# Altium PCB PCB1.PcbDoc
Units mil, origin at the board's own origin, x right, y up, seen from the top; angles counter-clockwise.
Board outline 2490.03 x 1245.03 mil, 2 copper layers (Top Layer, Bottom Layer), stack 34.331 mil thick; 22 components, 18 nets, 80 pads, 4 vias.
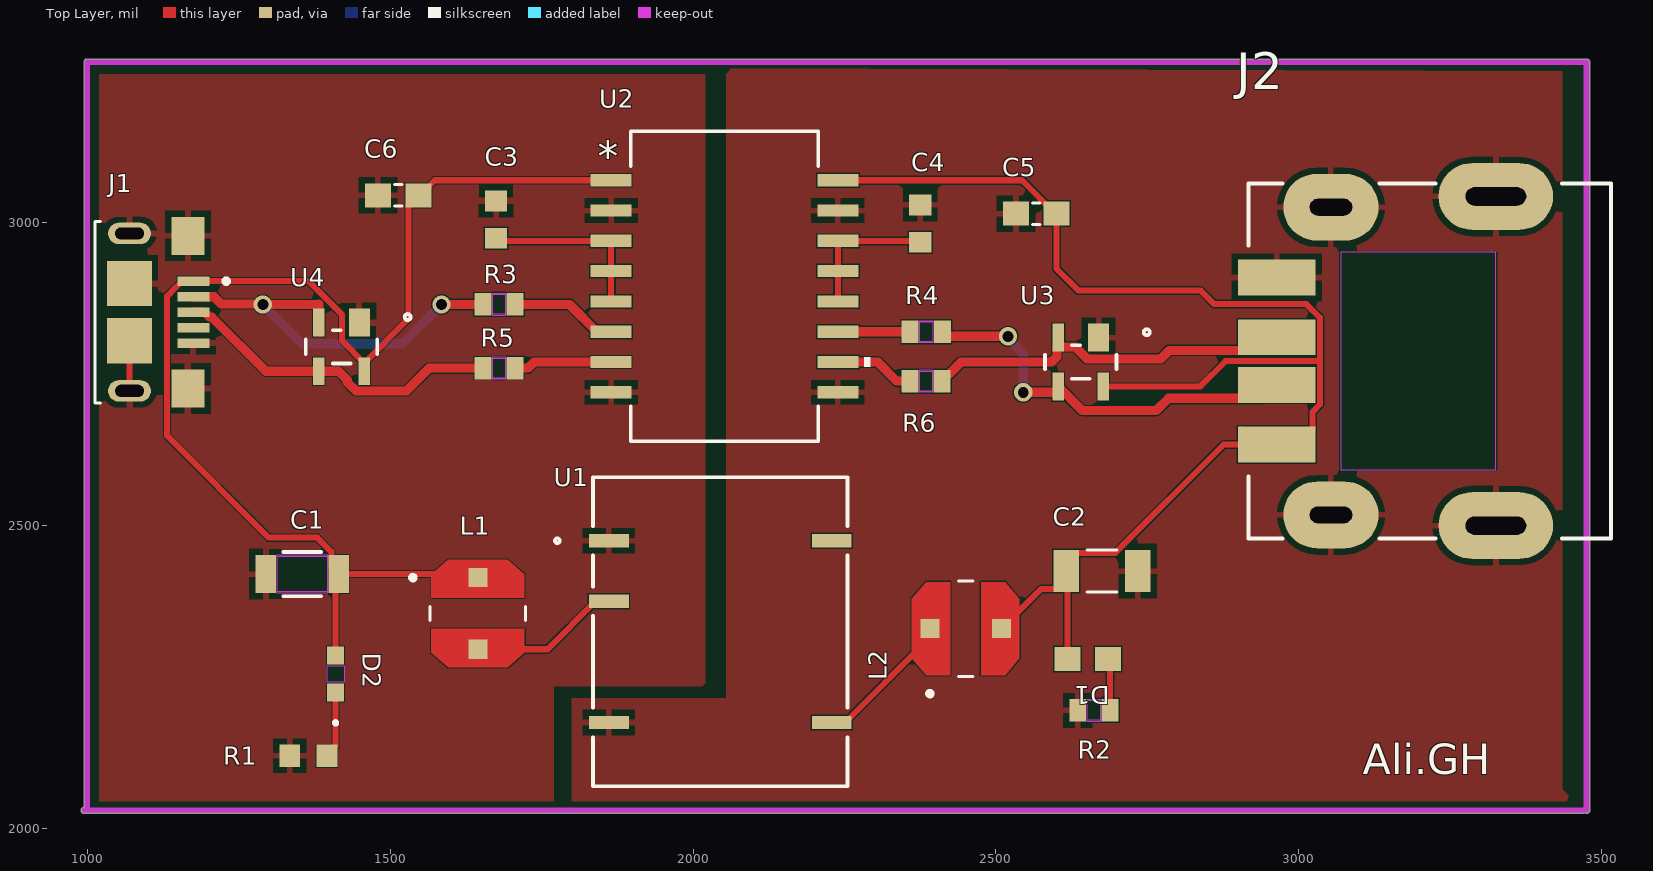
[diagram p0: Top Layer view]
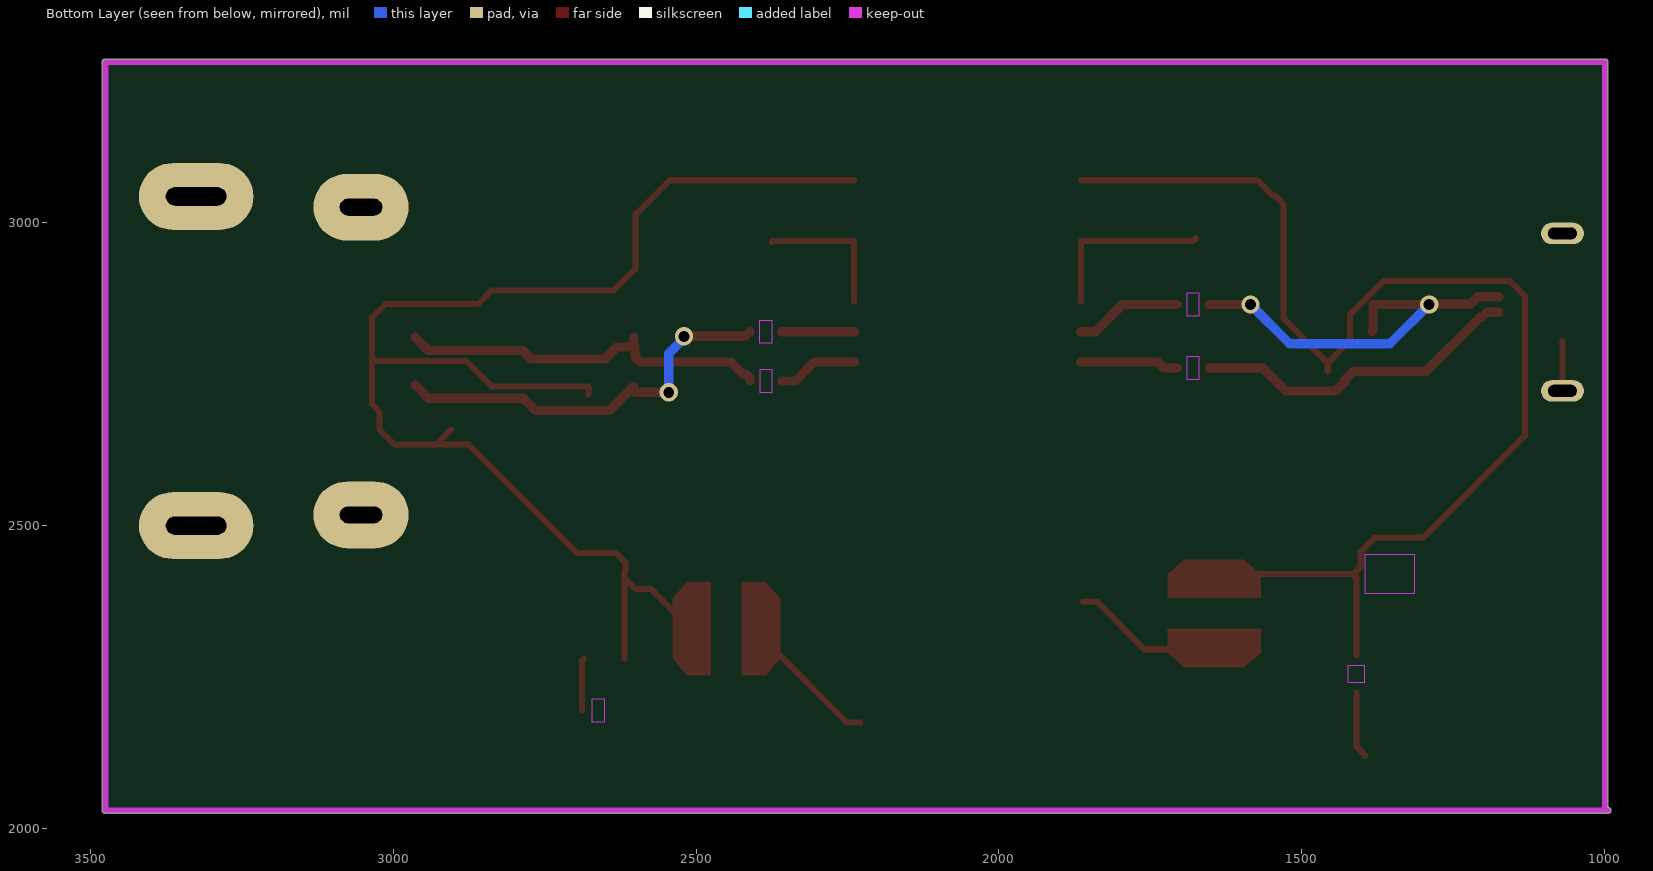
[diagram p1: Bottom Layer view, seen from below]
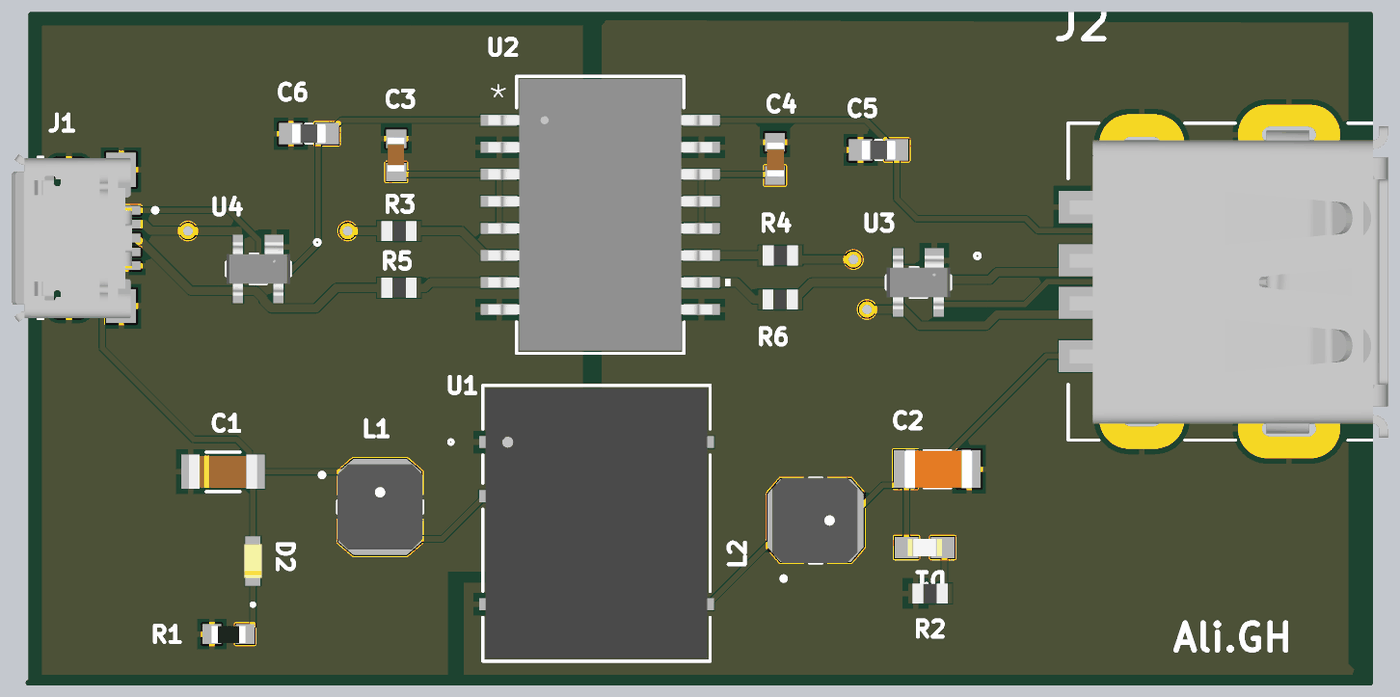
[diagram p2: 3D render of the assembled board from above, using the file's embedded part models]

## Layer stack, top to bottom
Top Solder: solder mask 0.3937, Solder Resist, Dk 3.5
Top Layer: signal copper 1.4173
Dielectric 1: dielectric 31.4961, FR-4, Dk 4.8
Bottom Layer: signal copper 1.4173
Bottom Solder: solder mask 0.3937, Solder Resist, Dk 3.5

## Board outline
995,2024.98 cw(c995,2030) 994.98,2035.02 994.99,3265 cw(c1000,3265) 1000,3270.01 3475,3270.01 cw(c3475,3265) 3480.01,3265 3480.01,2030 cw(c3475,2030) 3472.5,2025.65 3470,2024.98

## Design rules (kind name [scope] priority, off if disabled: settings)
AssemblyTestPointUsage [All] p1: valid=2
Clearance [All] p1: gap=2 ignorepadtopadclearanceinfootprint=TRUE except(1: Arc-Hole Track-Hole SMDPad-Hole THPad-Hole Via-Hole Fill-Hole Poly-Hole Region-Hole Text-Hole)
DiffPairsRouting [All] p1: maxlimit=5 minlimit=5 mostfreqgap=5 toplayer_minwidth=15.2 toplayer_maxwidth=15.2 toplayer_prefwidth=15.2 bottomlayer_minwidth=15.2 bottomlayer_maxwidth=15.2 bottomlayer_prefwidth=15.2 maxuncoupledlength=700
FabricationTestPointUsage [All] p1: valid=2 allowmultiple=FALSE
MinimumSolderMaskSliver [All] p1: minsoldermaskwidth=1
PolygonConnect [All] p1: connectstyle=Relief reliefconductorwidth=10 reliefentries=4 polygonreliefangle="90 Angle" airgapwidth=10
RoutingVias [All] p1: holewidth=28 width=50 viastyle="Through Hole" minholewidth=10 minwidth=25 maxholewidth=28 maxwidth=50
SilkToSolderMaskClearance [IsPad] p1: minsilkscreentomaskgap=3 clearancetoexposedcopper=TRUE
SolderMaskExpansion [All] p1: expansion=4 istentingtop=FALSE
Width [All] p1: maxlimit=10 minlimit=10 preferedwidth=10
25 further rules are at their usual default settings.

## Classes and differential pairs
differential pair DOUTT: +DOUTT_P -DOUTT_N
differential pair DOUT: +DOUT_P -DOUT_N
differential pair DINT: +DINT_P -DINT_N
differential pair DIN: +DIN_P -DIN_N

## Components (designator, comment, footprint, x,y, rotation, side; value= is the part's Value field where it differs from the comment)
C1 "4.7uF" CAP_CL31_SAM 1354.85,2420 r0 top
C2 "10uF" CAPC3216X140N 2675,2425 r180 top
C3 "0.1uF" CAPC1608X90N 1675,3005 r270 top
C4 "0.1uF" CAPC1608X90N 2375,2998.5 r90 top
C5 "1uF" CAPC1608X90 2566.54,3015 r0 top
C6 "1uF" CAPC1608X90 1513.46,3045 r180 top
D1 "Blue" 0603 2651.54,2280 r180 top
D2 "Green" LED_LTST-C191KGKT_LTO 1410,2255 r90 top
J1 "10118193-0001LF" AMPHENOL_10118193-0001LF 1070,2852.24 r270 top
J2 "1932638-3" CONN4_1932638-3_TEC 2963.58,2633.86 r90 top
L1 "15uH" IND_VLCF4028T-150MR88-2 1645,2355 r0 top
L2 "22uH" IND_VLCF4024T-220MR65-2 2450,2330 r90 top
R1 "680 Ohms" RESC1608X55N 1365,2120 r0 top
R2 "390Ohms" RES_CRCW_0603#1 2661.5,2195 r0 top
R3 "24Ohms" RES_CRCW_0603#2 1680,2865 r180 top
R4 "24Ohms" RES_CRCW_0603#1 2385,2820 r180 top
R5 "24Ohms" RES_CRCW_0603#1 1680,2760 r180 top
R6 "24Ohms" RES_CRCW_0603#1 2384.5,2738.5 r180 top
U1 "NXE2S0505MC-R7" NXE2_SINGLE_SURFACE_MUR 2045,2325 r0 top
U2 "ADUM4160BRIZ-RL" RI_16_2_ADI 2052.01,2895 r0 top
U3 "PRTR5V0U2X,215" SOT143B_PRTR5V0U2X,215_NEX 2640,2770 r180 top
U4 "PRTR5V0U2X,215" SOT143B_PRTR5V0U2X,215_NEX 1420,2795 r180 top

## Footprints (in the part's own frame and the unit in brackets; to place one, negate y for a bottom-side part, rotate by r counter-clockwise, add the part's x,y. Pads: shape width x height; smd on the part's side, far side on the other; paste and mask are expansions set on the pad)
0603 [mm]
  rect 1.1x1 smd: 1(-0.85,0) 2(0.85,0)
  body extent -0.8,-0.4 0.8,0.4, height 0.36
AMPHENOL_10118193-0001LF [mm]
  rect 0.4x1.35 smd: 1(-1.3,2.675) 2(-0.65,2.675) 3(0,2.675) 4(0.65,2.675) 5(1.3,2.675)
  rect 1.6x1.4 smd: S1(-3.2,2.45) S2(3.2,2.45)
  rect 1.9x1.9 smd: S3(1.2,0) S4(-1.2,0)
  oval 0.9x1.8 hole 0.5 slot 1.2 at 90 deg: S5(-3.3,0) S6(3.3,0)
  silkscreen extent -3.8,-1.45 3.8,4.15, body extent -3.92,-2.7 3.94,2.96, height 2.82
CAP_CL31_SAM [mm]
  rect 0.856x1.6 smd paste+0 mask+0: 1(-1.528,0) 2(1.528,0)
  Top Layer keep-out region: -1.049,-0.749 -1.049,0.749 1.049,0.749 1.049,-0.749
  Keep-Out Layer region: -1.049,-0.8 -1.049,0.8 1.049,0.8 1.049,-0.8
  silkscreen extent -0.79,-0.93 0.79,0.93, body extent -1.6,-0.8 1.6,0.8, height 1
CAPC1608X90 [mm]
  rect 1.1x1 smd: 1(-0.85,0) 2(0.85,0)
  silkscreen extent -0.15,-0.45 0.15,0.45, body extent -0.8,-0.46 0.8,0.44, height 0.78
CAPC1608X90N [mm]
  rect 0.87x0.93 smd: 1(-0.78,0) 2(0.78,0)
  body extent -0.84,-0.42 0.76,0.38, height 0.9
CAPC3216X140N [mm]
  rect 1.08x1.77 smd: 1(-1.495,0) 2(1.495,0)
  silkscreen extent -0.63,-0.88 0.63,0.88, body extent -1.65,-0.9 1.55,0.9, height 1.59
CONN4_1932638-3_TEC [mm]
  rect 1.5x3.25 smd paste+0 mask+0: 1(0,0) 2(2.5,0) 3(4.5,0) 4(7,0)
  oval 2.8x4.8 hole 0.762 slot 2.54 at 90 deg mask+0: 5(10.4,-9.18) 8(-3.4,-9.18)
  oval 2.8x4 hole 0.7 slot 1.778 at 90 deg mask+0: 6(9.95,-2.27) 7(-2.95,-2.27)
  Top Layer keep-out region: -1.05,-2.68 -1.05,-9.18 8.05,-9.18 8.05,-2.68
  silkscreen extent -3.94,-14.01 10.94,1.19, body extent -3.83,-13.82 10.8,1.12, height 7.62
IND_VLCF4024T-220MR65-2 [mm]
  rect 0.8x0.8 smd paste-1 mask+0: 1(0,1.5) 2(0,-1.5)
  Top Layer region: 1.95,-1.65 1.25,-2.25 -1.25,-2.25 -1.95,-1.65 -1.95,-0.65 1.95,-0.65
  Top Layer region: 1.95,1.65 1.95,0.65 -1.95,0.65 -1.95,1.65 -1.25,2.25 1.25,2.25
  silkscreen extent -2.82,-0.3 2,1.6, body extent -2,-1.97 2,2.03, height 2.41
IND_VLCF4028T-150MR88-2 [mm]
  rect 0.8x0.8 smd paste-1 mask+0: 1(0,1.5) 2(0,-1.5)
  Top Layer region: 1.95,-1.65 1.25,-2.25 -1.25,-2.25 -1.95,-1.65 -1.95,-0.65 1.95,-0.65
  Top Layer region: 1.95,1.65 1.95,0.65 -1.95,0.65 -1.95,1.65 -1.25,2.25 1.25,2.25
  silkscreen extent -2.82,-0.3 2,1.6, body extent -2,-2 2,2, height 2.8
LED_LTST-C191KGKT_LTO [mil]
  rect 30x28 smd paste+0 mask+0: 1(-30.5,0) 2(30.5,0)
  Top Layer keep-out region: -13.5,-14 -13.5,14 13.5,14 13.5,-14
  Keep-Out Layer region: -13.5,-14 -13.5,14 13.5,14 13.5,-14
  silkscreen extent -83,-3 -78,3, body extent -31,-16 31,16, height 22
NXE2_SINGLE_SURFACE_MUR [mil]
  rect 66x22 smd paste+0 mask+0: 1(-184,150) 3(-184,50) 7(-184,-150) 8(184,-150) 14(184,150)
  silkscreen extent -273,-255 210,255, body extent -205,-250 205,250, height 190
RES_CRCW_0603#1 [mil]
  rect 28x37 smd paste-18.5 mask-18.5: 1(-26.5,0) 2(26.5,0)
  Top Layer keep-out region: -10.5,-16.5 -10.5,16.5 10.5,16.5 10.5,-16.5
  Keep-Out Layer region: -10.5,-18.5 -10.5,18.5 10.5,18.5 10.5,-18.5
  body extent -33,-19 33,19, height 20
RES_CRCW_0603#2 [mil]
  rect 28x37 smd paste-18.5 mask-18.5: 2(26.5,0) 3(-26.5,0)
  Top Layer keep-out region: -10.5,-16.5 -10.5,16.5 10.5,16.5 10.5,-16.5
  Keep-Out Layer region: -10.5,-18.5 -10.5,18.5 10.5,18.5 10.5,-18.5
  body extent -33,-19 33,19, height 20
RESC1608X55N [mm]
  rect 0.87x0.93 smd: 1(-0.78,0) 2(0.78,0)
  body extent -0.8,-0.42 0.8,0.38, height 0.56
RI_16_2_ADI [mm]
  rect 1.721x0.511 smd paste+0 mask+0: 1(-4.75,4.445) 2(-4.75,3.175) 3(-4.75,1.905) 4(-4.75,0.635) 5(-4.75,-0.635) 6(-4.75,-1.905) 7(-4.75,-3.175) 8(-4.75,-4.445) 9(4.75,-4.445) 10(4.75,-3.175) 11(4.75,-1.905) 12(4.75,-0.635) 13(4.75,0.635) 14(4.75,1.905) 15(4.75,3.175) 16(4.75,4.445)
  silkscreen extent -3.93,-6.5 6.12,6.5, body extent -5.26,-6.38 5.26,6.38, height 2.64
SOT143B_PRTR5V0U2X,215_NEX [mil]
  rect 35x46 smd paste+0 mask+0: 1(-29.4,-40.21)
  rect 19x46 smd paste+0 mask+0: 2(37.4,-40.21) 3(37.4,40.21) 4(-37.4,40.21)
  silkscreen extent -114,-54 59,28, body extent -59,-49 59,49, height 43

## Part data
C1: library part CL31B475KOHNNNE, "No Description Available", Mfr_Name=Samsung
C2: library part CL31B106MOHNNNE, Package=None, Availability=Unavailable, MP=CL31B106MOHNNNE, Price=None
C3 C4: library part CL10B104KB8NNNL, "0.1ÂµF Â±10% 50V Ceramic Capacitor X7R 0603 _1608 Metric_", Package="0603 Samsung", Availability=Unavailable, MF="Samsung Electro-Mechanics", MP=CL10B104KB8NNNL, Price=None, SnapEDA_Link=https://www.snapeda.com/parts/CL10B104KB8NNNL/Samsung%20Electro-Mechanics/view-part/3598555/?ref=snap
C5 C6: library part CC0603KRX5R8BB105, "ÐšÐµÑ€Ð°Ð¼Ð¸Ñ‡ÐµÑÐºÐ¸Ð¹ ÐºÐ¾Ð½Ð´ÐµÐ½ÑÐ°Ñ‚Ð¾Ñ€ 1 Ð¼ÐºÐ¤ Â± 10% 25 Ð’ X5R 0603 _1608 Ð¼ÐµÑ‚Ñ€Ð¸Ñ‡ÐµÑÐºÐ¸Ñ…_", Package="0603 Yageo", Availability=Unavailable, MF=Yageo, MP=CC0603KRX5R8BB105, Price=None, SnapEDA_Link=https://www.snapeda.com/parts/CC0603KRX5R8BB105/Yageo/view-part/1820893/?ref=snap
D1: library part LTST-C194TBKT, "Blue 468nm LED Indication - Discrete 3.3V 0603 _1608 Metric_", Package="0603 Lite-On", Digi-Key_Part_Number=160-1837-1-ND, Digi-Key_Purchase_URL=https://www.digikey.com/product-detail/en/lite-on-inc/LTST-C194TBKT/160-1837-1-ND/2356236?utm_source=snapeda&utm_medium=aggregator&utm_campaign=symbol, MF="Lite-On Inc.", MP=LTST-C194TBKT, SnapEDA_Link=https://www.snapeda.com/parts/LTST-C194TBKT/Lite-On%20Inc./view-part/426592/?ref=snap
D2: library part LTST-C191KGKT, "No Description Available", Mfr_Name=LITE-ON, Type="LED Indication"
J1: "Micro USB 2.0, Input Output Connectors, B TYPE RECEPTACLE", Package=None, Availability="In Stock", Check_prices=https://www.snapeda.com/parts/10118193-0001LF/Amphenol+FCI/view-part/?ref=eda, MF="Amphenol ICC", MP=10118193-0001LF, Price=None, Purchase-URL=https://pricing.snapeda.com/search/part/10118193-0001LF/?ref=eda, SnapEDA_Link=https://www.snapeda.com/parts/10118193-0001LF/Amphenol+FCI/view-part/?ref=snap
J2: "No Description Available", Mfr_Name="TE Connectivity", RefDes=RefDes, Type=Type
L1: library part VLCF4028T-150MR88-2, "SMD / SMT Inductor (Coil), 1.2 - 470 nH, 100 kHz, 0.25 - 3.11 A, 27 - 3980 Ohm, 4 x 4 x 2.8 (LxWxH)", Package="NON STANDARD-2 TDK", Check_prices=https://www.snapeda.com/parts/VLCF4028T-150MR88-2/TDK/view-part/?ref=eda, MF=TDK, MP=VLCF4028T-150MR88-2, SnapEDA_Link=https://www.snapeda.com/parts/VLCF4028T-150MR88-2/TDK/view-part/?ref=snap
L2: library part VLCF4024T-220MR65-2, Package=None, Availability=Unavailable, MF="{'manufacturer': u'TDK Corporation'}", MP=VLCF4024T-220MR65-2, Price=None
R1: library part CR0603-JW-681ELF, "Res Thick Film 0603 680 Ohm 5% 1/10W Â±200ppm/Â°C Molded SMD SMD Paper Tape on Plastic Reel", Package=None, Availability=Unavailable, MP=CR0603-JW-681ELF, Price=None
R2: library part CRCW0603390RFKEA, "No Description Available", Mfr_Name=Vishay
R3 R4 R5 R6: library part CRCW060324R0FKEA, "No Description Available", Mfr_Name=Vishay
U1: "No Description Available", Mfr_Name=Murata, RefDes=RefDes, Type="DC DC Converters"
U2: "No Description Available", Mfr_Name="Analog Devices Inc", RefDes=RefDes, Type=Type
U3 U4: "No Description Available", Mfr_Name=Nexperia, RefDes=RefDes, Type=Type

## Via types
v1: diameter 30, hole 18, Top Layer to Bottom Layer, 4 vias

## Nets (pads, with @x,y where several pads share a name; then routed paths per layer and width w, separated by ;. In a path a pad name is that pad's centre, name@x,y a point inside that pad or via, vN(x,y) a via of type N, cw(c..) or ccw(c..) an arc to the next point about the centre after c; other vN are vias at no path point)
5VIN: C1.2 C6.1 D2.2 J1.1 L1.1 U2.1 U4.4 | length 2065.9
  Top Layer w10: D2.2 1410,2415 C1.2 ; U4.4 U4.4@1457.4,2768.29 ; L1.1 1639.06,2420 C1.2 ; U2.1 1573.9,3070 1548.9,3045 C6.1 1544.96,3045 1530.28,3030.31 1530.28,2841.16 U4.4@1457.4,2768.29 ; C1.2 1403.16,2431.84 1403.16,2456.84 1380,2480 1300,2480 1131.9,2648.1 1131.9,2878.77 1146.61,2893.48 1146.67,2893.48 1156.61,2903.43 J1.1 1365.63,2903.43 1420.77,2848.28 1420.77,2804.92 U4.4@1457.4,2768.29
5VOUT: C2.2 C5.2 D1.2 J2.1 L2.2 U2.16 U3.4 | length 2352.9
  Top Layer w10: U2.16 2543.03,3070 2598.03,3015 C5.2 2600,2924.25 2636.33,2887.92 2838.28,2887.92 2860.51,2865.69 3012.32,2865.69 3034.56,2843.45 3034.56,2771.65 ; L2.2 2574.21,2395.16 2599.88,2395.16 C2.2@2616.14,2411.42 ; D1.2 2618.07,2423.07 C2.2 2616.14,2438.58 2632.4,2454.84 2697.01,2454.84 2876.02,2633.86 J2.1@2929.13,2633.86 ; U3.4@2677.4,2716.29 U3.4 2837.3,2729.79 2879.16,2771.65 3034.56,2771.65 ; J2.1@2904.61,2658.39 J2.1@2929.13,2633.86 ; J2.1@2929.13,2633.86 J2.1 2998.03,2633.86 3022.56,2658.39 3022.56,2687.86 3034.56,2699.86 3034.56,2771.65
DIN_N: J1.2 R3.2 U4.2 | length 677.1
  Top Layer w15.2: J1.2 1209.49,2877.83 1221.51,2865.81 1289.19,2865.81 v1(1290,2865) 1381.79,2865 1382.6,2865.81 U4.2 1382.6,2821.71 U4.2@1384.5,2819.81 ; v1(1585,2865) R3.2
  Bottom Layer w15.2: v1(1290,2865) 1355,2800 1520,2800 v1(1585,2865)
DIN_P: J1.3 R5.2 U4.3 | length 549.8
  Top Layer w15.2: J1.3 1194.02,2852.24 1202.13,2844.13 1205.87,2844.13 1295.2,2754.79 1414.89,2754.79 1429.41,2740.27 1429.41,2736.7 1443.93,2722.19 1526.61,2722.19 1564.42,2760 R5.2
DINT_N: R3.3 U2.6 | length 177.1
  Top Layer w15.2: R3.3 1796.17,2865 1841.17,2820 U2.6
DINT_P: R5.1 U2.7 | length 162.6
  Top Layer w15.2: R5.1 1728.1,2760 1738.1,2770 U2.7
DOUT_N: R4.2 U2.11 | length 119.5
  Top Layer w15.2: U2.11 R4.2
DOUT_P: R6.2 U2.10 | length 132
  Top Layer w15.2: U2.10 2304.9,2770 2336.4,2738.5 R6.2
DOUTT_N: J2.2 R4.1 U3.3 | length 675.6
  Top Layer w15.2: R4.1 2419.1,2812.4 v1(2519.98,2812.4) ; v1(2545,2720) 2600.7,2720 2602.6,2721.9 U3.3 2642.39,2690 2764.62,2690 2784.97,2710.35 2941.65,2710.35 J2.2
  Bottom Layer w15.2: v1(2519.98,2812.4) 2519.98,2808.98 2545,2783.97 v1(2545,2720)
DOUTT_P: J2.3 R6.1 U3.2 | length 626.1
  Top Layer w15.2: R6.1 2411,2743 2417.4,2749.4 2421.9,2749.4 2442.5,2770 2591.79,2770 2600.7,2778.9 2600.7,2794.81 U3.2@2602.6,2796.71 ; U3.2 U3.2@2602.6,2796.71 ; J2.3 2941.65,2789.09 2785.92,2789.09 2771.83,2775 2650.54,2775 2630.73,2794.81 2604.5,2794.81 U3.2@2602.6,2796.71
GND1: C1.1 C3.1 C6.2 J1.5 J1.S1 J1.S2 J1.S3 J1.S4 J1.S5 J1.S6 R1.1 U1.1 U2.2 U2.8 U4.1 | length 82.7
  Top Layer w10: J1.S6 J1.S3
GND2: C2.1 C4.2 C5.1 J2.4 J2.5 J2.6 J2.7 J2.8 R2.1 U1.7 U2.9 U2.15 U3.1
NetD1_1: D1.1 R2.2 | length 86.2
  Top Layer w10: D1.1 2688,2277 R2.2
NetD2_1: D2.1 R1.2 | length 110.4
  Top Layer w10: R1.2 1395.71,2121.18 1410,2135.47 D2.1
NetL1_2: L1.2 U1.3 | length 248.7
  Top Layer w10: L1.2 1759.94,2295.94 1839,2375 U1.3
NetL2_1: L2.1 U1.8 | length 235
  Top Layer w10: U1.8 2251,2175 2380.2,2304.2 2380.2,2319.25 L2.1
VDD1: C3.2 U2.3 U2.4 U2.5 | length 291.8
  Top Layer w10: C3.2 1679.29,2970 U2.3 U2.4 U2.5
VDD2: C4.1 U2.12 U2.13 U2.14 | length 236.9
  Top Layer w10: U2.12 U2.13 U2.14 2372.79,2970 C4.1
pads on no net: J1.4 U1.14

## Polygon pours and split planes (outlines as drawn)
no net on Layer0 "Default Coverlay 1 Top" (split plane): 992.92,2024.98 989.99,2027.92 989.98,2032.07 992.91,2035.01 994.98,2035.02 994.98,3265 994.98,3266 995.75,3267.84 997.16,3269.25 999,3270.02 3476,3270.02 3477.84,3269.25 3479.25,3267.84 3480.02,3266 3480.02,3265 3480.02,2030 3480.02,2028.66 3478.67,2026.33 3476.35,2024.99 3473.66,2024.98 3472.5,2025.65 3470,2024.98
no net on Layer0 "Default Coverlay 1 Bottom" (split plane): 992.92,2024.98 989.99,2027.92 989.98,2032.07 992.91,2035.01 994.98,2035.02 994.98,3265 994.98,3266 995.75,3267.84 997.16,3269.25 999,3270.02 3476,3270.02 3477.84,3269.25 3479.25,3267.84 3480.02,3266 3480.02,3265 3480.02,2030 3480.02,2028.66 3478.67,2026.33 3476.35,2024.99 3473.66,2024.98 3472.5,2025.65 3470,2024.98
GND1 on Top Layer "GND1_L01_P003" (solid, pour order 3): 2020,3245 2020,2240 2015,2235 1770,2235 1770,2045 1020,2045 1020,3245 1020,2045 1020,3245
GND2 on Top Layer "GND2_L01_P002" (solid, pour order 2): 2050,3255 2055,3250 2055,2215 1800,2215 1800,2045 3455,2045 3435,2065 3435,3250

## Keep-outs
Keep-Out Layer:
  lines w10: 995,2030 1717.5,2030 3162.5,2030 3470,2030 ; 1000,2030 1000,3265 3475,3265 3475,2030

## Silkscreen, mask and mechanical layers (free items; w line width, h text height)
Top Overlay:
  text "Ali.GH" at 3105,2090 h50

## Text inside footprints (layer, text, board x,y; h text height)
J1: Mechanical 13 "PCB END" at 1022.76,2661.3 h16 r270
J2: Mechanical 13 "PCB EDGE" at 3508.58,2693.86 h50 r90
U2: Top Overlay "*" at 1842.5,3085.11 h50; Mechanical 13 "*" at 1904.9,3092.98 h50